# Altium PCB brd3_layout.PcbDoc
Units mil, origin at the board's own origin, x right, y up, seen from the top; angles counter-clockwise.
Board outline 2725 x 3900 mil, 2 copper layers (Top Layer, Bottom Layer), stack 61.756 mil thick; 41 components, 40 nets, 171 pads, 64 vias.
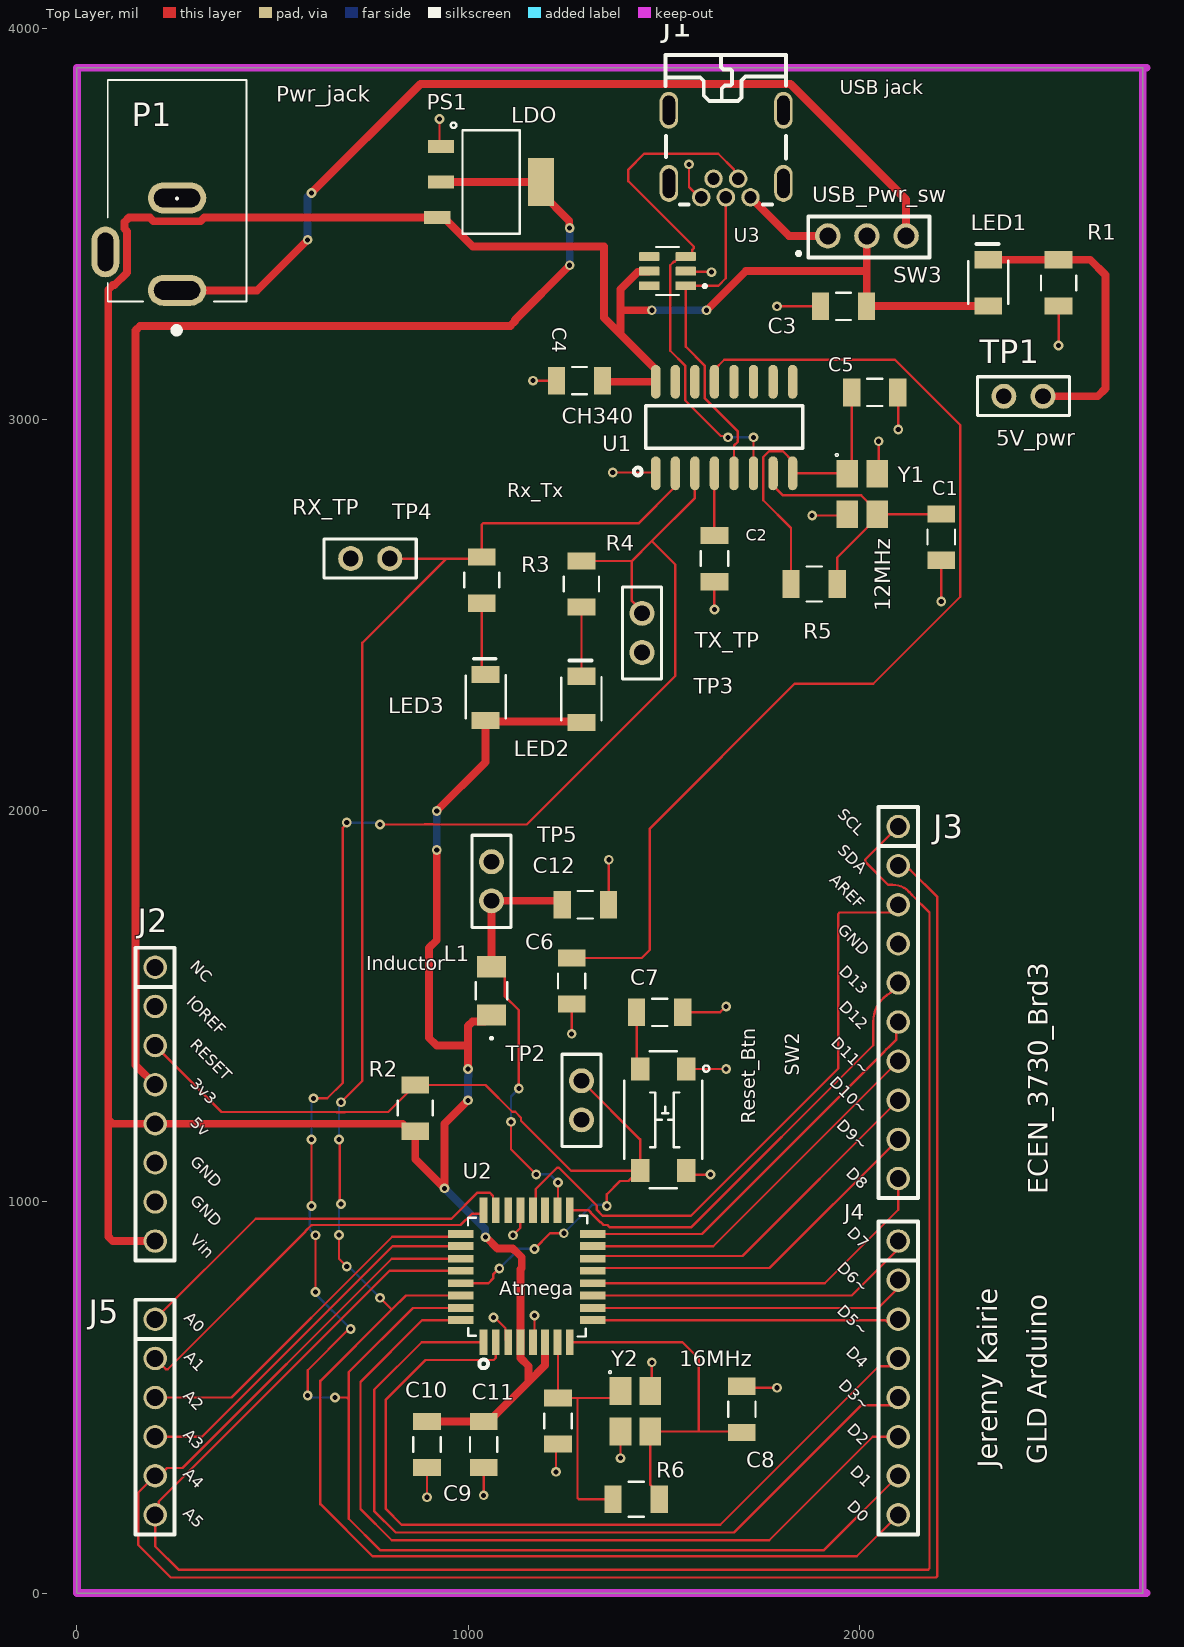
[diagram p0: Top Layer view]
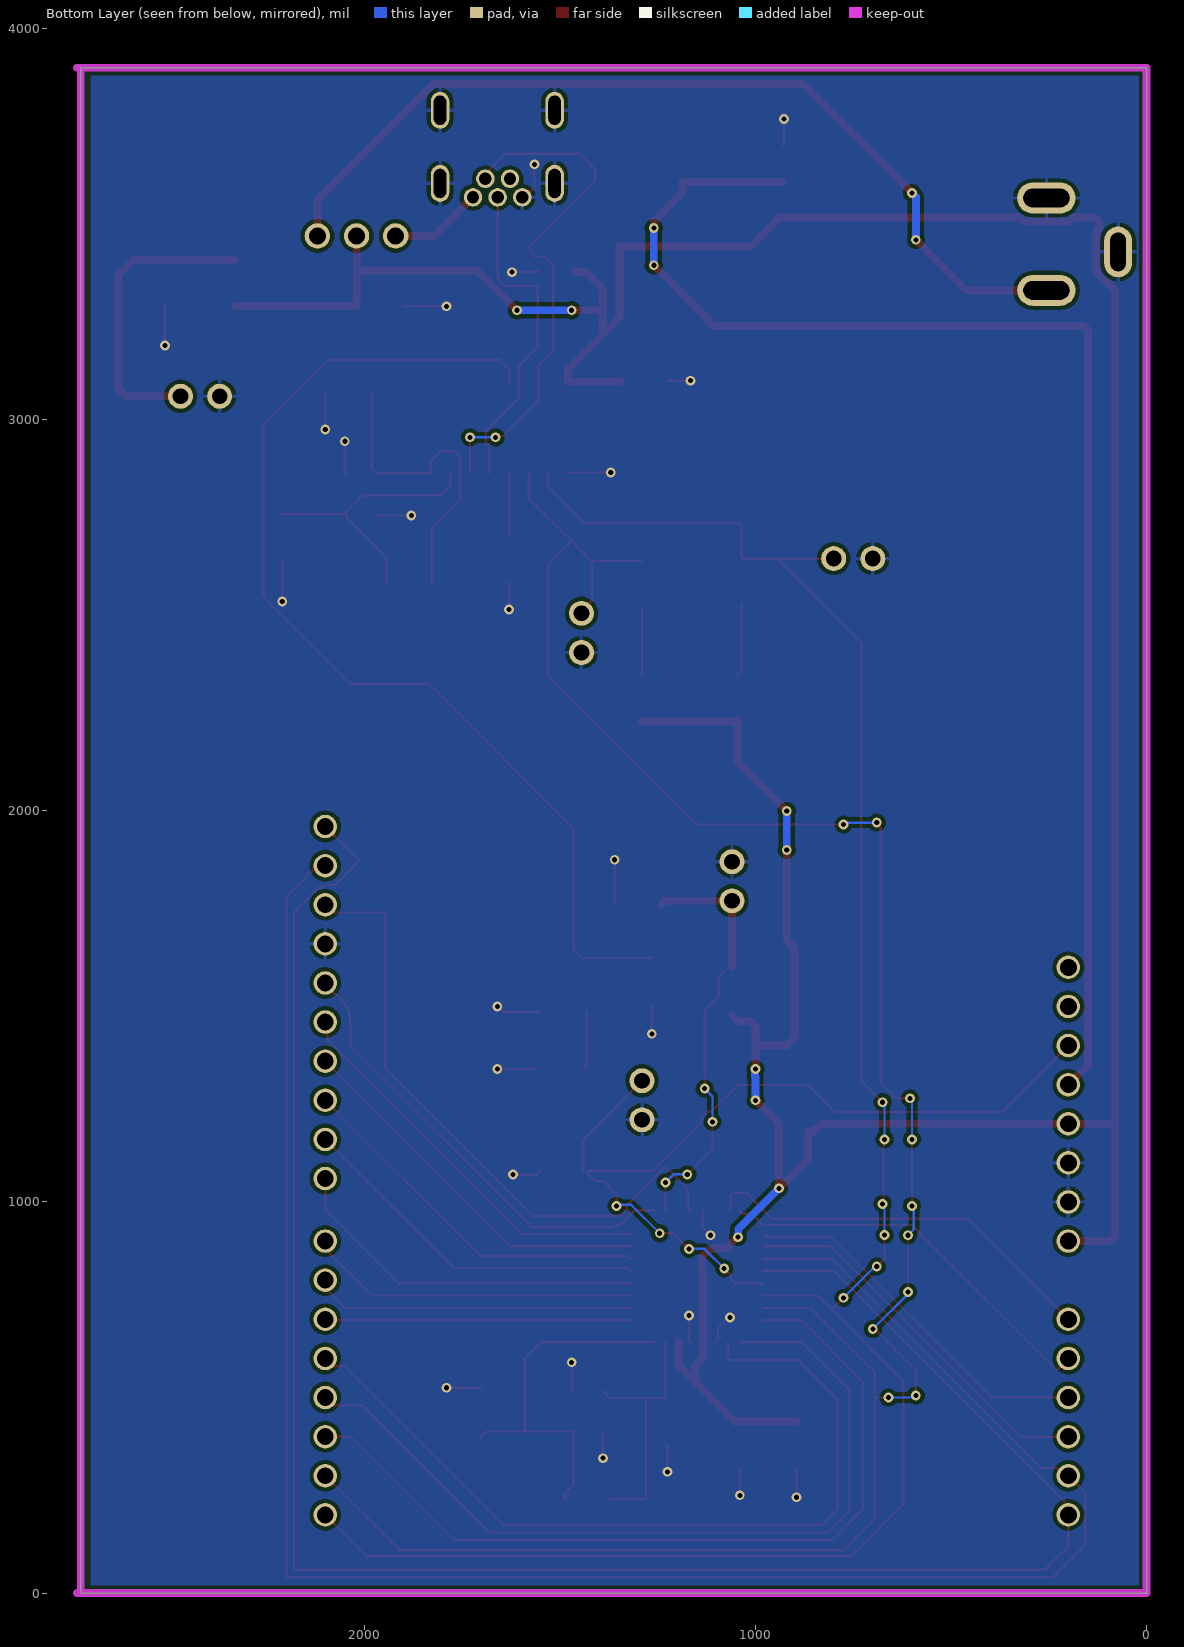
[diagram p1: Bottom Layer view, seen from below]
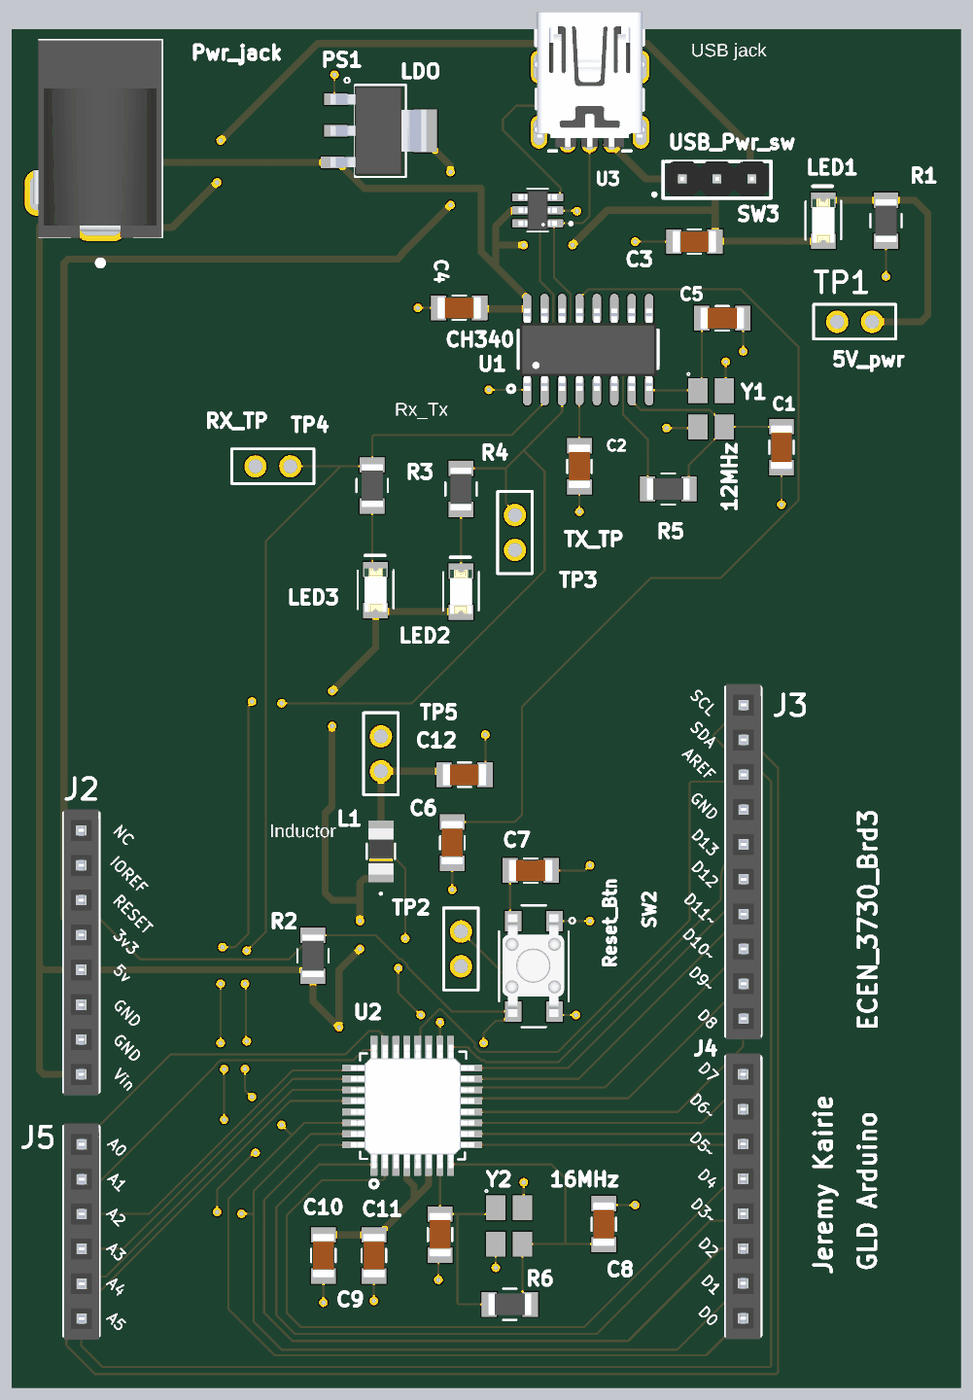
[diagram p2: 3D render of the assembled board from above, using the file's embedded part models]

## Layer stack, top to bottom
Top Solder: solder mask 1, SM-001, Dk 4
Top Layer: signal copper 1.378
Dielectric 1: core 59, Core-043, Dk 4.3
Bottom Layer: signal copper 1.378
Bottom Solder: solder mask 1, SM-001, Dk 4

## Board outline
0,0 2725,0 2725,3900 0,3900

## Design rules (kind name [scope] priority, off if disabled: settings)
Clearance [All] p1: gap=10 ignorepadtopadclearanceinfootprint=FALSE
PlaneClearance [All] p1: clearance=10
PlaneConnect [All] p1: planeconnectstyle=Direct reliefexpansion=20 reliefentries=4 reliefconductorwidth=10 reliefairgap=10
PolygonConnect [All] p1: thpad.connectstyle=Relief thpad.reliefconductorwidth=10 thpad.reliefentries=4 thpad.polygonreliefangle="90 Angle" thpad.airgapwidth=10 smdpad.connectstyle=Direct smdpad.reliefconductorwidth=10 smdpad.reliefentries=4 smdpad.polygonreliefangle="90 Angle" smdpad.airgapwidth=10 via.connectstyle=Direct via.reliefconductorwidth=10 via.reliefentries=4 via.polygonreliefangle="90 Angle" via.airgapwidth=10
RoutingVias [All] p1: holewidth=13 width=25 viastyle="Through Hole" minholewidth=13 minwidth=25 maxholewidth=60 maxwidth=80
SolderMaskExpansion [All] p1: expansion=4 istentingtop=FALSE
SupplyNets "Schematic Supply Nets_2" [InNet('+5')] p1: voltage=0.000
SupplyNets "Schematic Supply Nets_1" [InNet('GND')] p2: voltage=0.000
UnRoutedNet [All] p1: checkbadconnections=TRUE
Width "Schematic Width Constraint_4" [InNet('+5')] p1: maxlimit=100 minlimit=10 preferedwidth=20 minimp=50.000000 maximp=50.000000 favimp=50.000000
Width "Schematic Width Constraint_2" [InNet('NetJ1_1')] p2: maxlimit=100 minlimit=10 preferedwidth=20 minimp=50.000000 maximp=50.000000 favimp=50.000000
Width "Schematic Width Constraint_1" [InNet('+5V')] p3: maxlimit=100 minlimit=10 preferedwidth=20 minimp=50.000000 maximp=50.000000 favimp=50.000000
Width "Schematic Width Constraint" [InNet('3.3V')] p4: maxlimit=100 minlimit=10 preferedwidth=20 minimp=50.000000 maximp=50.000000 favimp=50.000000
Width [All] p5: maxlimit=100 minlimit=6 preferedwidth=6 minimp=50.000000 maximp=50.000000 favimp=50.000000
27 further rules are at their usual default settings.

## Components (designator, comment, footprint, x,y, rotation, side; value= is the part's Value field where it differs from the comment)
C1 "22pF" 1206_Passive_Capacitor 2210,2700 r90 top
C2 "22uF" 1206_Passive_Capacitor 1630,2645 r90 top
C3 "22uF" 1206_Passive_Capacitor 1960,3290 r0 top
C4 "22uF" 1206_Passive_Capacitor 1285,3100 r0 top
C5 "22pF" 1206_Passive_Capacitor 2040,3070 r0 top
C6 "22uF" 1206_Passive_Capacitor 1265,1565 r270 top
C7 "1uF" 1206_Passive_Capacitor 1490,1485 r0 top
C8 "22pF" 1206_Passive_Capacitor 1700,470 r270 top
C9 "22pF" 1206_Passive_Capacitor 1230,440 r90 top
C10 "22uF" 1206_Passive_Capacitor 895,380 r90 top
C11 "22uF" 1206_Passive_Capacitor 1040,380 r90 top
C12 "10uF" 1206_Passive_Capacitor 1300,1760 r180 top
J1 "USB Mini" USB_MINI_B 1660,3680 r180 top value="USB mini B"
J2 "PPTC081LFBN-RC" 8_PIN_ARD-PWR_100MIL 200,1600 r270 top value=Female
J3 "PPTC101LFBN-RC" 10_PIN_ARDUINO_100MIL 2100,1960 r270 top value=Female
J4 "PPTC081LFBN-RC" 8_PIN_ARD-DIG_100MIL 2100,900 r270 top value=Female
J5 "PPTC061LFBN-RC" 6_PIN_ARD-Analog_100mil 200,700 r270 top value=Female
L1 "FB_10uH_1206" AIML-1206_ABR-M 1060,1540 r90 top
LED1 "Green" LED_1206 2330,3350 r90 top
LED2 "Green" LED_1206 1290,2285 r90 top
LED3 "Green" LED_1206 1045,2290 r90 top
P1 "Power Jack" Power_Jack 256,3330.78 r90 top value="CONN PWR JACK 2X5.5MM SOLDER"
PS1 "AMS1117-3.3" LDO 1059,3608 r270 top value="IC REG LINEAR 3.3V 800MA SOT223"
R1 "1k" 1206_Passive_Resitor 2510,3350 r90 top value="1K Ohm"
R2 "10k" 1206_Passive_Resitor 865,1240 r90 top value=10KOhm
R3 "1k" 1206_Passive_Resitor 1290,2580 r270 top value="1K Ohm"
R4 "1k" 1206_Passive_Resitor 1035,2590 r90 top value="1K Ohm"
R5 "1M" 1206_Passive_Resitor 1885,2580 r0 top value="1M Ohm"
R6 "1M" 1206_Passive_Resitor 1430,240 r0 top value="1M Ohm"
SW2 "TL3305AF160QG" Switch_JLC 1499.05,1210.08 r270 top
SW3 "PREC003SAAN-RC" 3_PIN_100mil 1920,3470 r0 top value="CONN HEADER VERT 3POS 2.54MM"
TP1 "10x Probe TP" TP_Diff_Probe 2470,3060 r180 top
TP2 "10x Probe TP" TP_Diff_Probe 1290,1310 r270 top
TP3 "10x Probe TP" TP_Diff_Probe 1445,2505 r270 top
TP4 "10x Probe TP" TP_Diff_Probe 800,2645 r180 top
TP5 "10x Probe TP" TP_Diff_Probe 1060,1770 r90 top
U1 "CH340G" "USB to serial" 1655,2980 r0 top value="USB to Serial"
U2 "ATMEGA328P-ANR" ATMega328P 1150,810 r270 top value="IC MCU 8BIT 32KB FLASH 32TQFP"
U3 "TESD5V0V4UCX6_RFG" SOT95P280X145-6N 1510,3380 r180 top
Y1 "X322512MSB4SI" "Crystal resonator" 2010,2810 r270 top value=12MHz
Y2 "X322516MLB4SI" "Crystal resonator" 1430,465 r270 top value=16MHz

## Footprints (in the part's own frame and the unit in brackets; to place one, negate y for a bottom-side part, rotate by r counter-clockwise, add the part's x,y. Pads: shape width x height; smd on the part's side, far side on the other; paste and mask are expansions set on the pad)
3_PIN_100mil [mm]
  round 1.65 hole 1.1: 1(0,0) 2(2.54,0) 3(5.08,0)
  silkscreen extent -2,-1.4 6.6,1.27, body extent -1.14,-1.27 6.48,1.27, height 8.38
6_PIN_ARD-Analog_100mil [mil]
  round 60 hole 43.31: 1(0,0) 2(100,0) 3(200,0) 4(300,0) 5(400,0) 6(500,0)
  silkscreen extent -50,-50 550,50, body extent -59,-49 561,51, height 335
8_PIN_ARD-DIG_100MIL [mil]
  round 60 hole 43.31: 1(0,0) 2(100,0) 3(200,0) 4(300,0) 5(400,0) 6(500,0) 7(600,0) 8(700,0)
  silkscreen extent -50,-50 750,50, body extent -60,-50 760,50, height 335
8_PIN_ARD-PWR_100MIL [mil]
  round 60 hole 43.31: 1(0,0) 2(100,0) 3(200,0) 4(300,0) 5(400,0) 6(500,0) 7(600,0) 8(700,0)
  silkscreen extent -50,-50 750,50, body extent -60,-50 760,50, height 335
10_PIN_ARDUINO_100MIL [mil]
  round 60 hole 43.31: 1(0,0) 2(100,0) 3(200,0) 4(300,0) 5(400,0) 6(500,0) 7(600,0) 8(700,0) 9(800,0) 10(900,0)
  silkscreen extent -50,-50 950,50, body extent -60,-49 960,51, height 335
1206_Passive_Capacitor [mil]
  rect 44x71 smd: 1(-59,0) 2(59,0)
  silkscreen extent -19,-35 19,35, body extent -63,-31 63,32, height 50
1206_Passive_Resitor [mil]
  rect 44x71 smd: 1(-59,0) 2(59,0)
  silkscreen extent -19,-45 19,45, body extent -61,-31 61,31, height 26
AIML-1206_ABR-M [mil]
  rect 54x73 smd paste+0 mask+0: 1(-61.5,0) 2(61.5,0)
  silkscreen extent -124,-40 22,40, body extent -66,-36 66,36, height 55
ATMega328P [mm]
  rect 1.65x0.508 smd mask+0.025: 1(4.28,-2.794) 2(4.28,-2.007) 3(4.28,-1.194) 4(4.28,-0.406) 5(4.28,0.406) 6(4.28,1.194) 7(4.28,2.007) 8(4.28,2.794) 17(-4.28,2.794) 18(-4.28,2.007) 19(-4.28,1.194) 20(-4.28,0.406) 21(-4.28,-0.406) 22(-4.28,-1.194) 23(-4.28,-2.007) 24(-4.28,-2.794)
  rect 0.508x1.65 smd mask+0.025: 9(2.843,4.28) 10(2.056,4.28) 11(1.243,4.28) 12(0.455,4.28) 13(-0.357,4.28) 14(-1.145,4.28) 15(-1.958,4.28) 16(-2.745,4.28) 25(-2.745,-4.28) 26(-1.958,-4.28) 27(-1.145,-4.28) 28(-0.357,-4.28) 29(0.455,-4.28) 30(1.243,-4.28) 31(2.056,-4.28) 32(2.843,-4.28)
  silkscreen extent -3.94,-3.81 5.97,3.94, body extent -4.45,-4.47 4.55,4.53, height 1.16
"Crystal resonator" [mm]
  rect 1.8x1.4 smd: 1(-1.32,-1.02) 2(1.32,-1.02) 3(1.32,0.92) 4(-1.32,0.92)
  silkscreen extent -2.63,-1.79 -2.45,-1.61, body extent -1.65,-1.2 1.65,1.2, height 0.8
LDO [mm]
  rect 0.838x1.7 smd: 1(-2.311,-3.25) 2(0,-3.25) 3(2.311,-3.5)
  rect 3.099x1.7 smd: 4(0,3.25)
  silkscreen extent -3.86,-2.62 3.35,1.85, body extent -3.25,-3.65 3.25,3.35, height 1.85
LED_1206 [mil]
  rect 44x71 smd: 1(-59,0) 2(59,0)
  silkscreen extent -54,-51 99,51, body extent -63,-31 63,31, height 28
Power_Jack [mm]
  oval 2x3.8 hole 1.2 slot 3 at 90 deg: 1(0,0) 2(6,0)
  oval 3.3x1.8 hole 1 slot 2.5 at 0 deg: 3(2.5,4.65)
  silkscreen extent -2.79,-4.5 13.68,4.5, body extent -0.76,-4.45 13.64,4.95, height 11.49
SOT95P280X145-6N [mm]
  rrect25% 1.35x0.58 smd: 1(-1.185,0.95) 2(-1.185,0) 3(-1.185,-0.95) 4(1.185,-0.95) 5(1.185,0) 6(1.185,0.95)
  silkscreen extent -2.52,-1.57 0.75,1.57, body extent -1.4,-1.45 1.4,1.45, height 1.45
Switch_JLC [mm]
  rect 1.5x1.2 smd: 1(-3.3,1.5) 2(3.3,1.5) 3(-3.3,-1.5) 4(3.3,-1.5)
  silkscreen extent -4.44,-2.54 4.45,3, body extent -3.8,-2.29 3.7,2.21, height 3.7
TP_Diff_Probe [mm]
  round 1.62 hole 1.02: 1(0,0) 2(2.54,0)
  silkscreen extent -1.72,-1.27 4.26,1.26
"USB to serial" [mil]
  oval 24x86.61 smd: 1(-175,-117) 2(-125,-117) 3(-75,-117) 4(-25,-117) 5(25,-117) 6(75,-117) 7(125,-117) 8(175,-117) 9(175,117) 10(125,117) 11(75,117) 12(25,117) 13(-25,117) 14(-75,117) 15(-125,117) 16(-175,117)
  silkscreen extent -231,-122 201,56, body extent -197,-118 197,118, height 71
USB_MINI_B [mm]
  round 1.2 hole 0.8: 1(-1.58,2.826) 2(-0.78,1.622) 3(0.02,2.826) 4(0.82,1.622) 5(1.62,2.826)
  oval 1.2x2.4 hole 0.8 slot 1.9 at 90 deg: 6(-3.72,1.924) 7(3.72,1.924) 8(-3.72,-2.826) 9(3.72,-2.826)
  silkscreen extent -3.89,-6.42 3.93,3.3, body extent -4.04,-6.83 4.06,3.02, height 3.98

## Part data
C1 C5 C8 C9: library part C_22pF_1206, "22pF ±5% 1kV C0G 1206 Multilayer Ceramic Capacitors MLCC - SMD/SMT RoHS", LCSC Part#=C107174, MFR Part #=CC1206JKNPOCBN220, Datasheet=https://datasheet.lcsc.com/lcsc/1810241219_YAGEO-CC1206JKNPOCBN220_C107174.pdf, Type=Extended
C2 C3 C4 C6 C10 C11: library part C_22uF_1206, "22uF ±10% 25V X5R 1206 Multilayer Ceramic Capacitors MLCC - SMD/SMT RoHS", LCSC Part#=C12891, MFR Part #=CL31A226KAHNNNE, Datasheet=https://datasheet.lcsc.com/lcsc/1811031514_Samsung-Electro-Mechanics-CL31A226KAHNNNE_C12891.pdf, Type=basic
C7: library part C_1uF_1206, "MULTILAYER CERAMIC CAPACITORS MLCC - SMD/SMT 1UF 50V 1206 ROHS", LCSC Part#=C1848, MFR Part #=CL31B105KBHNNNE, Digikey Link=https://www.digikey.com/product-detail/en/C1206C105M4RACTU/399-8150-1-ND/3471873/?itemSeq=304982366, Type=Basic
C12: library part C_10uF_1206, "10uF ±10% 50V X5R 1206 Multilayer Ceramic Capacitors MLCC - SMD/SMT RoHS", LCSC Part#=C13585, MFR Part #=CL31A106KBHNNNE, Datasheet=https://datasheet.lcsc.com/lcsc/1810221112_Samsung-Electro-Mechanics-CL31A106KBHNNNE_C13585.pdf, Type=Basic
J1: library part J_USB_B_Mini, "Through Hole USB Connectors RoHS", LCSC Part#=C46398, MFR Part #=920-462A2021D10102, Datasheet=https://datasheet.lcsc.com/szlcsc/2103081233_Jing-Extension-of-the-Electronic-Co-920-462A2021D10102_C46398.pdf, Type=Extended
J2: library part JF_8_PIN_FEMA_ARD-Pwr, "8 Position Header Connector 0.100\" (2.54mm) Through Hole Tin", LCSC Part#=C27438, Digikey Link=https://www.digikey.com/product-detail/en/PPTC081LFBN-RC/S7006-ND/810147/?itemSeq=304982354, MFR Part #=PPTC081LFBN-RC, Type=Extended
J3: library part JF_10_PIN_FEMA_ARDUINO, "10 Position Header Connector 0.100\" (2.54mm) Through Hole Tin", LCSC Part#=C225507, Digikey Link=https://www.digikey.com/product-detail/en/PPTC101LFBN-RC/S7008-ND/810149/?itemSeq=304982352, MFR Part #=PPTC101LFBN-RC, Type=Extended
J4: library part JF_8_PIN_FEMA_ARD-Dig, "8 Position Header Connector 0.100\" (2.54mm) Through Hole Tin", LCSC Part#=C27438, Digikey Link=https://www.digikey.com/product-detail/en/PPTC081LFBN-RC/S7006-ND/810147/?itemSeq=304982354, MFR Part #=PPTC081LFBN-RC, Type=Extended
J5: library part JF_6_PIN_FEMA_ARD-Anolog, "6 Position Header Connector 0.100\" (2.54mm) Through Hole Tin", LCSC Part#=C40877, Digikey Link=https://www.digikey.com/product-detail/en/PPTC061LFBN-RC/S7004-ND/810145/?itemSeq=304982353, MFR Part #=PPTC061LFBN-RC, Type=Extended
L1: "25mA 10uH ±10% 800mΩ 1206  Inductors (SMD) ROHS", LCSC Part#=C1051, MFR Part #=CMI321609X100KT, Mfr_Name="FH (Guangdong Fenghua Advanced Tech)", Datasheet=https://datasheet.lcsc.com/lcsc/1810311314_FH--Guangdong-Fenghua-Advanced-Tech-CMI321609X100KT_C1051.pdf, Type=Basic
LED1 LED2 LED3: library part LED_GREEN_1206, "Green 513~528nm 1206 Light Emitting Diodes (LED) RoHS", LCSC Part#=C434439, MFR Part #=SZYY1206G, Datasheet=https://datasheet.lcsc.com/lcsc/2006301532_Yongyu-Photoelectric-SZYY1206G_C434439.pdf, Type=Extended
P1: library part "P_Power Jack", "Power Barrel Connector Jack 2.10mm ID (0.083\"), 5.50mm OD (0.217\") Through Hole, Right Angle", LCSC Part#=C136744, MFR Part #=PJ-102A, Digikey Link=https://www.digikey.com/product-detail/en/PJ-102A/CP-102A-ND/275425/?itemSeq=304982367, Type=Extended
PS1: library part PS_AMS_LDO_3v3, "LOW DROPOUT REGULATORS(LDO) POSITIVE FIXED 1.3V @ 800MA 15V 3.3V 1A SOT-223 ROHS", LCSC Part#=C6186, MFR Part #=AMS1117-3.3, Type=Basic
R1 R3 R4: library part R_1K_1206, "CHIP RESISTOR - SURFACE MOUNT 1KOHMS ±1% 1/4W 1206 ROHS", LCSC Part#=C4410, MFR Part #=RNCP1206FTD1K00CT, Digikey Link=https://www.digikey.com/product-detail/en/RNCP1206FTD1K00/RNCP1206FTD1K00CT-ND/2240675/?itemSeq=304982373, Type=Basic
R2: library part R_10KOhm_1206, "10 kOhms ±5% 0.25W, 1/4W Chip Resistor 1206 (3216 Metric) Automotive AEC-Q200 Thick Film", LCSC Part#=C17902, MFR Part #=RMCF1206FT10K0, Digikey Link=https://www.digikey.com/en/products/detail/stackpole-electronics-inc/RMCF1206FT10K0/1759669, Type=Basic
R5 R6: library part R_1M_1206, "CHIP RESISTOR - SURFACE MOUNT 1MOHMS ±1% 1/4W 1206 ROHS", LCSC Part#=C17927, MFR Part #=RMCF1206JT1M00, Digikey Link=https://www.digikey.com/product-detail/en/RMCF1206JT1M00/RMCF1206JT1M00CT-ND/1942830/?itemSeq=304982358, Type=Basic
SW2: library part SW_Push_Button_JLC, "Tactile Switch SPST-NO Top Actuated Surface Mount", LCSC Part#=C2837550, MFR Part #=KH-4.5X4.5X4.3H-STM, Datasheet=https://datasheet.lcsc.com/lcsc/2106081532_Shenzhen-Kinghelm-Elec-KH-4.5X4.5X4.3H-STM_C2837550.pdf, Type=Extended
SW3: library part SW_3Pin_100mil_Switch, "Connector Header Through Hole 3 position 0.100\" (2.54mm)", LCSC Part#=C49257, Digikey Link=https://www.digikey.com/product-detail/en/PREC003SAAN-RC/S1012EC-03-ND/2774851/?itemSeq=304982371, MFR Part #=PREC003SAAN-RC, Type=Extended
TP1 TP2 TP3 TP4 TP5: library part TP_Diff_Probe, "Test Point 300 mil centers"
U1: library part U_USBtoSerial, "Transceiver USB 2.0 2Mbps SOP-16_150mil USB ICs RoHS", LCSC Part#=C14267, Datasheet=https://datasheet.lcsc.com/lcsc/2008191806_WCH-Jiangsu-Qin-Heng-CH340G_C14267.pdf, MFR Part #=CH340G, Type=Basic
U2: library part U_ATMega328P, "AVR AVR® ATmega Microcontroller IC 8-Bit 20MHz 32KB (16K x 16) FLASH 32-TQFP (7x7)", LCSC Part#=C14877, MFR Part #=ATMEGA328P-AU, Digikey Link=https://www.digikey.com/product-detail/en/ATMEGA328P-ANR/ATMEGA328P-ANRCT-ND/2774230/?itemSeq=304982365, Type=Basic
U3: "SOT-26, 5V, 75W, 0.6pF, ESD Protection", Package=None, Check_prices=https://www.snapeda.com/parts/TESD5V0V4UCX6%20RFG/Taiwan+Semiconductor/view-part/?ref=eda, MF="Taiwan Semiconductor", MP="TESD5V0V4UCX6 RFG", SnapEDA_Link=https://www.snapeda.com/parts/TESD5V0V4UCX6%20RFG/Taiwan+Semiconductor/view-part/?ref=snap
Y1: library part X_12MHz_Res, "SMD Crystal Resonators 12MHz ±10ppm SMD-3225_4P RoHS", LCSC Part#=C9002, Datasheet=https://datasheet.lcsc.com/szlcsc/Yangxing-Tech-X322512MSB4SI_C9002.pdf, MFR Part #=X322512MSB4SI, Type=Basic
Y2: library part X_16Mhz_Res, "±10ppm 16000000Hz -40℃~85℃ 贴片无源晶振 60Ω 9pF SMD3225-4P Crystals ROHS", LCSC Part#=C13738, MFR Part #=X322516MLB4SI, Type=Basic

## Via types
v1: diameter 25, hole 13, Top Layer to Bottom Layer, 64 vias

## Nets (pads, with @x,y where several pads share a name; then routed paths per layer and width w, separated by ;. In a path a pad name is that pad's centre, name@x,y a point inside that pad or via, vN(x,y) a via of type N, cw(c..) or ccw(c..) an arc to the next point about the centre after c; other vN are vias at no path point)
3.3V: J2.4 PS1.2 PS1.4 | length 3629.1
  Top Layer w20: J2.4 150,1350 150,3228.28 161.72,3240 1108.28,3240 1120,3251.72 1120,3255 v1(1260,3395) ; PS1.2 PS1.4 1186.95,3580.46 1259.04,3508.37 1259.04,3490.96 v1(1260,3490)
  Bottom Layer w20: v1(1260,3395) v1(1260,3490)
+5: P1.1 SW3.3 | length 2362.4
  Top Layer w20: P1.1 460.78,3330.78 v1(590,3460) ; v1(600,3580) 878.5,3858.5 1824.52,3858.5 2120,3563.02 SW3.3
  Bottom Layer w20: v1(590,3460) 590,3570 v1(600,3580)
+5V: C3.2 C4.2 C10.2 C11.2 J2.5 J2.8 L1.1 LED1.1 LED2.1 LED3.1 PS1.3 R2.1 SW3.2 U1.16 U2.4 U2.6 U3.5 | length 9667.6
  Top Layer w20: J2.8 91.72,900 80,911.72 80,1211.72 ; C10.2 C11.2 1053.5,439 1155,540.5 ; v1(920,1900) 920,1669.32 900,1649.32 900,1420 920,1400 1000,1400 ; v1(920,2000) 1045,2125 LED3.1 1047.5,2228.5 1287.5,2228.5 LED2.1 ; v1(1000,1260) 940,1200 v1(940,1035) 865,1110 R2.1 851.5,1181 832.5,1200 J2.5 91.72,1200 80,1211.72 ; v1(1000,1340) 1000,1400 ; v1(1045,910) 1046.35,910 1075.59,880.76 1114.24,880.76 1117.5,877.5 1118.46,877.5 1137.5,858.46 1137.5,831.54 1134,828.04 U2.4 1134,601 1155,580 1155,540.5 ; L1.1 1043,1461.5 1011.72,1461.5 1000,1449.78 1000,1400 ; U2.6 1197,582.5 1155,540.5 ; C4.2 1347,3097 U1.16 1480,3128.31 1347.6,3260.71 1347.6,3443 1012.17,3443 938.17,3517 325.4,3517 316.03,3507.63 195.97,3507.63 186.6,3517 133.06,3517 121.34,3505.28 121.34,3488.72 128.36,3481.69 128.36,3376.72 95.89,3344.24 91.72,3344.24 80,3332.53 80,1211.72 ; 1390,3219.32 1390,3276.59 ; U3.5 1461.93,3378.58 1434.73,3378.58 1390,3333.86 1390,3276.59 ; v1(1470,3280) 1393.41,3280 1390,3276.59 ; v1(1610,3280) 1710,3380 2019.5,3380 ; SW3.2 2019.5,3469.5 2019.5,3380 ; LED1.1 2020,3291 C3.2 2019.5,3290.5 2019.5,3380
  Bottom Layer w20: v1(920,1900) v1(920,2000) ; v1(940,1035) 1044.04,930.96 1044.04,910.96 v1(1045,910) ; v1(1000,1260) 1000,1320 1001.72,1321.72 1000.96,1322.47 1000.96,1339.04 v1(1000,1340) ; v1(1470,3280) v1(1610,3280)
A0_PC0: J5.1 U2.23 | length 1041.5
  Top Layer w6: J5.1 457.07,957.07 957.7,957.07 1024.62,1023.98 1055.38,1023.98 1064,1015.37 1064,985.5 U2.23
A1_PC1: J5.2 U2.24 | length 1021.1
  Top Layer w6: J5.2 227.51,572.49 232.49,572.49 584.5,924.5 584.5,925.56 599.44,940.5 600.5,940.5 601.07,941.07 981.07,941.07 1010,970 1033,970 1040,977 U2.24
A2_PC2: J5.3 U2.25 | length 954.7
  Top Layer w6: J5.3 395,500 806.07,911.07 974.5,911.07 U2.25
A3_PC3: J5.4 U2.26 | length 983.2
  Top Layer w6: J5.4 320,400 807.07,887.07 U2.26
A4_PC4: J3.2 J5.5 U2.27 | length 5154.7
  Top Layer w6: U2.27 805.07,855.07 270,320 230.18,320 210.18,300 J5.5 157,257 157,123 240,40 2196.49,40 2200,43.51 2200,1780 2130.33,1849.67 2110.33,1849.67 J3.2
A5_PC5: J3.1 J5.6 U2.28 | length 5158.9
  Top Layer w6: U2.28 799.07,824.07 209.08,234.08 209.08,209.08 J5.6 200,120 260,60 2176.49,60 2180,63.51 2180,1740 2135.58,1784.42 2133.27,1787.24 ccw(c2100,1760) 2129.03,1791.72 2120.16,1799.84 ccw(c2084.43,1749.05) 2077.51,1810.76 2077.19,1810.76 2074.7,1810.76 2015.21,1870.24 2015.21,1875.21 J3.1
A_REF: J3.3 U2.20 | length 1617.1
  Top Layer w6: U2.20 1173,985.5 1173,1033 1227.51,1087.51 1232.49,1087.51 1329.5,990.5 1329.5,979.44 1344.44,964.5 1569.5,964.5 1946.4,1341.4 1946.4,1736.49 1949.92,1740 J3.3@2100,1740
DTR: C6.1 U1.13 | length 2735.8
  Top Layer w6: C6.1 1444,1624 1465,1645 1465,1955 1835,2325 2036.06,2325 2258.5,2547.44 2258.5,2986.38 2091.58,3153.31 1655,3153.31 1630,3128.31 U1.13
GND: C1.1 C2.1 C3.1 C4.1 C5.2 C6.2 C7.2 C8.1 C9.1 C10.1 C11.1 C12.1 J1.5 J1.6 J1.7 J1.8 J1.9 J2.6 J2.7 J3.4 P1.2 P1.3 PS1.1 R1.1 SW2.1 SW2.2 TP1.2 TP2.2 TP3.2 TP4.2 TP5.2 U1.1 U2.3 U2.5 U2.21 U3.2 Y1.2 Y1.4 Y2.2 Y2.4 | length 2231.9
  Top Layer w6: v1(895,245) C10.1 ; v1(927,3769) 927,3703.05 PS1.1 ; v1(1040,250) C11.1 ; v1(1065,705) 1068.36,705 1096,677.36 1096,648.5 U2.3 ; v1(1115,915) 1134,934 U2.21 ; U2.5 1170,645.5 v1(1170,710) ; v1(1166,3100) C4.1 ; v1(1225,310) 1225,376 C9.1 ; v1(1265,1430) C6.2 ; C12.1 1360,1761 v1(1360,1875) ; v1(1370,2865) 1478,2865 U1.1 ; Y2.2 1390,412.87 v1(1390,345) ; Y2.4 1470,520.75 v1(1470,590) ; C7.2 1644.59,1485 1659.59,1500 v1(1660,1500) ; SW2.2@1549.06,1080.08 1559.13,1070 v1(1620,1070) ; U3.2 1558.03,3378.62 1621.51,3378.62 v1(1622.88,3377.25) ; SW2.1@1559.13,1340 v1(1660,1340) ; v1(1565,3652.99) 1565,3595 1591.25,3568.75 J1.5 ; v1(1630,2515) C2.1 ; C8.1 1704,525 v1(1790,525) ; v1(1790,3290) C3.1 ; v1(1880,2755) 1966.81,2755 Y1.2 ; Y1.4 2050,2865.75 v1(2050,2945) ; C5.2 2100,3069 v1(2100,2975) ; v1(2210,2535) C1.1 ; v1(2510,3190) R1.1
NetC2_2: C2.2 U1.4 | length 159
  Top Layer w6: C2.2 U1.4
NetC7_1: C7.1 SW2.3 | length 148.7
  Top Layer w6: C7.1 1431,1349 SW2.3
NetC8_2: C8.2 R6.2 U2.8 Y2.3 | length 972.5
  Top Layer w6: U2.8 1548.5,641.5 1590,600 1590,413.03 ; R6.2@1480,249 R6.2 1489,253.5 1466.22,276.28 Y2.3 1590,413.03 ; C8.2@1688.97,412.03 C8.2@1703.4,397.6 ; C8.2@1688.97,413.03 1590,413.03
NetC9_2: C9.2 R6.1 U2.7 Y2.1 | length 658.1
  Top Layer w6: U2.7 1230,640.5 C9.2 1280,499 ; R6.1 1283.51,240 1280,243.51 1280,499 ; Y2.1 1371.87,499 1280,499
NetC12_2: C12.2 L1.2 TP5.1 U2.18 | length 1090.1
  Top Layer w6: L1.2 1069.5,1601.5 1093.5,1577.5 1093.5,1526.88 1130,1490.38 v1(1130,1290) ; v1(1110,1205) 1110,1135 v1(1174.47,1070.53) ; U2.18 1230,979.5 v1(1230,1050)
  Top Layer w20: L1.2 TP5.1 1231,1770 C12.2
  Bottom Layer w6: v1(1110,1205) 1110,1270 v1(1130,1290) ; v1(1174.47,1070.53) 1209.47,1070.53 v1(1230,1050)
NetJ1_1: J1.1 SW3.1 | length 238.7
  Top Layer w20: J1.1 1820.95,3470 SW3.1
NetLED1_2: LED1.2 R1.2 TP1.1 | length 774.4
  Top Layer w20: LED1.2 R1.2 2591,3409 2630,3370 2630,3080 2610,3060 TP1.1
NetLED2_2: LED2.2 R3.2 | length 177
  Top Layer w6: LED2.2 R3.2
NetLED3_2: LED3.2 R4.1 | length 186.1
  Top Layer w6: R4.1 1035,2359 LED3.2
PB0_D8: J3.10 U2.12 | length 919.3
  Top Layer w6: U2.12 1912.07,792.07 2100,980 J3.10@2100,1040
PB1_D9: J3.9 U2.13 | length 920.6
  Top Layer w6: U2.13 1325.5,831.07 1771.07,831.07 J3.9
PB2_D10: J3.8 U2.14 | length 949.2
  Top Layer w6: U2.14 1325.5,862.07 1702.07,862.07 J3.8
PB3_D11: J3.7 U2.15 | length 977.4
  Top Layer w6: U2.15 1627.07,887.07 J3.7
PB4_D12: J3.6 U2.16 | length 1009.5
  Top Layer w6: U2.16 1598.07,918.07 2065.05,1385.05 cw(c2100,1360) 2074.95,1394.95 2094.51,1414.51 2094.51,1434.49 J3.6@2100,1439.97
PB5_D13: J3.5 U2.17 | length 1176.9
  Top Layer w6: U2.17 1309.28,978.5 1313.5,974.28 1313.5,972.81 1337.81,948.5 1339.28,948.5 1346.71,941.07 1356.37,941.07 1362.44,935 1570,935 2035.95,1400.95 2035.95,1460.34 ; 2035.95,1460.39 cw(c2121.14,1460.35) 2098.49,1542.47 2101.35,1545.33 2101.35,1548.16 J3.5
PC6_RST: J2.3 R2.2 SW2.4 TP2.1 U2.29 | length 2315.2
  Top Layer w6: J2.3 370,1230 663.94,1230 664.44,1229.5 685.56,1229.5 686.06,1230 796,1230 R2.2 1044.45,1299 1112.95,1230.5 1120.56,1230.5 1135.5,1215.56 1135.5,1207.95 1263.37,1080.08 1430.95,1080.08 1430.95,1074.17 1410.32,1053.55 1388.55,1053.55 1355,1020 v1(1355,990) ; U2.29 1052.07,792.07 1064.22,804.22 1064.22,814.22 v1(1080,830) ; v1(1170,880) 1210,920 v1(1245,920) ; TP2.1 1440,1160 SW2.4
  Bottom Layer w6: v1(1080,830) 1130,880 v1(1170,880) ; v1(1245,920) 1317.51,992.51 1352.49,992.51 v1(1355,990)
PD2_D2: J4.6 U2.32 | length 2164.9
  Top Layer w6: U2.32 883.07,698.07 725,540 725,215 805,135 1770,135 2035,400 J4.6
PD3_D3: J4.5 U2.1 | length 2137.7
  Top Layer w6: U2.1 881.5,641.5 760,520 760,210 815,155 1680,155 2005,480 J4.5@2100,480
PD4_D4: J4.4 U2.2 | length 2139.7
  Top Layer w6: U2.2 1071,601 1066.02,596.02 891.02,596.02 790,495 790,215 830,175 1645,175 2050,580 J4.4@2100,580
PD5_D5: J4.3 U2.9 | length 789
  Top Layer w6: U2.9 2067.32,698.07 2085.39,680 J4.3@2100,680
PD6_D6: J4.2 U2.10 | length 802.6
  Top Layer w6: U2.10 2049.07,729.07 J4.2@2100,780
PD7_D7: J4.1 U2.11 | length 830.8
  Top Layer w6: U2.11 1981.07,761.07 J4.1@2100,880
RX_328: J4.8 R4.2 TP4.1 U1.2 U2.30 | length 5328.3
  Top Layer w6: v1(670,915.57) 670,855 v1(690,835) ; v1(670,1160) 672.5,1157.5 672.5,997.5 v1(675,995) ; v1(675,1255) 730,1310 730,2430 945,2645 ; v1(775,755) 805,725 ; TP4.1 945,2645 ; U2.30 841.07,761.07 805,725 ; U1.2 1530,2829.18 1435.82,2735 1038.51,2735 1035,2731.49 R4.2 1031,2645 945,2645 ; J4.8 1994,94 756,94 622.5,227.5 622.5,542.5 805,725
  Bottom Layer w6: v1(670,915.57) 670,991.49 673.51,995 v1(675,995) ; v1(670,1160) 670,1251.49 673.51,1255 v1(675,1255) ; v1(690,835) 694.99,835.01 v1(775,755)
TX_328: J4.7 R3.1 TP3.1 U1.3 U2.31 | length 5910
  Top Layer w6: v1(590,505) 590,570 695.01,675.01 v1(700,675) ; v1(600,990) v1(600,1160) ; v1(605,1265) 640,1265 680,1305 680,1956.99 690,1966.99 v1(690,1970) ; v1(610,770) v1(610,915) ; v1(660,500) 690,500 695,495 ; v1(775,1965) 888.94,1965 889.44,1965.5 910.56,1965.5 911.06,1965 1150,1965 1530,2345 1530,2630 1470,2690 ; U2.31 859.07,729.07 695,565 695,495 ; R3.1 1419,2639 ; TP3.1 1445,2510.83 1419,2536.83 1419,2639 ; U1.3 1580,2800 1470,2690 ; J4.7 1910,110 775,110 695,190 695,495 ; 1419,2639 1470,2690
  Bottom Layer w6: v1(590,505) 590,503.51 593.51,500 v1(660,500) ; v1(600,990) 598.51,990 595,986.49 595,930.41 610,915.41 v1(610,915) ; v1(600,1160) 600,1261.49 603.51,1265 v1(605,1265) ; v1(610,770) 610,765 v1(700,675) ; v1(690,1970) 771.49,1970 775,1966.49 v1(775,1965)
UD+_D+: J1.3 U1.5 U3.1 | length 856.5
  Top Layer w6: J1.3 1659.22,3361.74 1640.07,3342.6 U3.1 1556.65,3187.01 1605,3138.66 1605,3055.34 1690,2970.34 1690,2943.94 1680,2933.94 U1.5
UD-_D-: J1.2 U1.6 U3.3 | length 1352.7
  Top Layer w6: v1(1664.5,2955) 1660.86,2958.64 1646.36,2958.64 1555,3050 1555,3138.66 1517.08,3176.58 1517.08,3395.13 1526.37,3404.42 1528.51,3404.42 1541.5,3417.4 U3.3 1565.14,3417.4 1573.56,3425.82 1573.56,3434.3 1577.14,3437.89 1577.14,3442.86 1410,3610 1410,3640 1450,3680 1640,3680 1680.22,3639.78 1680.22,3637.79 1690.72,3627.3 J1.2 ; U1.6 v1(1730,2955)
  Bottom Layer w6: v1(1664.5,2955) v1(1730,2955)
XI_OSC2: C1.2 R5.2 U1.7 Y1.3 | length 717.2
  Top Layer w6: U1.7 1780,2831.69 1805,2806.69 2005.43,2806.69 2046.22,2765.91 Y1.3 ; R5.2 1944,2647.94 2046.22,2750.16 Y1.3 ; C1.2 2209.03,2758.03 Y1.3
XO_OSC1: C5.1 R5.1 U1.8 Y1.1 | length 827.7
  Top Layer w6: R5.1 1826,2723.08 1755,2794.08 1755,2904.66 1769.64,2919.31 1805,2919.31 1830,2894.31 U1.8 1968.81,2863 1981,2875.19 C5.1
pads on no net: J1.4 J2.1 J2.2 U1.9 U1.10 U1.11 U1.12 U1.14 U1.15 U2.19 U2.22 U3.4 U3.6

## Polygon pours and split planes (outlines as drawn)
GND on Bottom Layer "GND_L02_P000" (solid, pour order 0): 0,3900 2700,3900 2700,0 0,0

## Keep-outs
Keep-Out Layer:
  lines w20: 2735,0 0,0 ; 2735,3900 0,3900 ; 0,0 0,3900 ; 0,0 2725,0 2725,3900 0,3900 ; 0,0 0,3900

## Silkscreen, mask and mechanical layers (free items; w line width, h text height)
Top Overlay:
  text "USB jack" at 1950,3821.29 h60
  text "Pwr_jack" at 510,3813.33 h40
  text "LDO" at 1110,3760 h40
  text "USB_Pwr_sw" at 1880,3556.66 h40
  text "CH340" at 1240,2990 h40
  text "5V_pwr" at 2350,2933.33 h40
  text "Rx_Tx" at 1100,2790.66 h60
  text "RX_TP" at 550,2756.66 h40
  text "12MHz" at 2080,2510 h40 r90
  text "TX_TP" at 1580,2416.66 h40
  text "Inductor" at 740,1580.63 h60
  text "Reset_Btn" at 1734.17,1200 h35 r90
  text "ECEN_3730_Brd3" at 2481.67,1020 h50 r90
  text "Atmega" at 1080,750 h60
  text "16MHz" at 1540,580 h40
  text "GLD Arduino" at 2480,330 h50 r90
  text "Jeremy Kairie" at 2353.34,320 h50 r90

## Text inside footprints (layer, text, board x,y; h text height)
J2: Top Overlay "NC" at 287.07,1600 h30 r315; Top Overlay "IOREF" at 278.39,1510 h30 r315; Top Overlay "3v3" at 287.07,1300 h30 r315; Top Overlay "5v" at 287.07,1200 h30 r315; Top Overlay "GND" at 287.07,1100 h30 r315; Top Overlay "GND" at 287.07,1000 h30 r315; Top Overlay "Vin" at 287.07,900 h30 r315; Top Overlay "RESET" at 287.07,1400 h30 r315
J3: Top Overlay "SCL" at 1943.21,1989 h30 r315; Top Overlay "SDA" at 1943.21,1897 h30 r315; Top Overlay "AREF" at 1922,1821 h30 r315; Top Overlay "GND" at 1943.21,1694 h30 r315; Top Overlay "D13" at 1946.74,1588 h30 r315; Top Overlay "D12" at 1946.74,1497 h30 r315; Top Overlay "D11~" at 1925.53,1404 h30 r315; Top Overlay "D10~" at 1922,1303 h30 r315; Top Overlay "D9~" at 1939.67,1194 h30 r315; Top Overlay "D8" at 1964.41,1071 h30 r315
J4: Top Overlay "D7" at 1966.81,919 h30 r315; Top Overlay "D6~" at 1942.07,829 h30 r315; Top Overlay "D4" at 1965,613 h30 r315; Top Overlay "D3~" at 1945,529 h30 r315; Top Overlay "D2" at 1967,416 h30 r315; Top Overlay "D1" at 1975,309 h30 r315; Top Overlay "D0" at 1966.81,219 h30 r315; Top Overlay "D5~" at 1942.07,719 h30 r315
J5: Top Overlay "A1" at 272,602 h30 r315; Top Overlay "A0" at 272,702 h30 r315; Top Overlay "A2" at 269.07,502 h30 r315; Top Overlay "A3" at 269.07,402 h30 r315; Top Overlay "A4" at 269.07,302 h30 r315; Top Overlay "A5" at 269.07,202 h30 r315